# Altium PCB op.PcbDoc
Units mm, origin at the board's own origin, x right, y up, seen from the top; angles counter-clockwise.
Board outline 18 x 18 mm, 2 copper layers (Top Layer, Bottom Layer); 12 components, 7 nets, 28 pads, 0 vias.
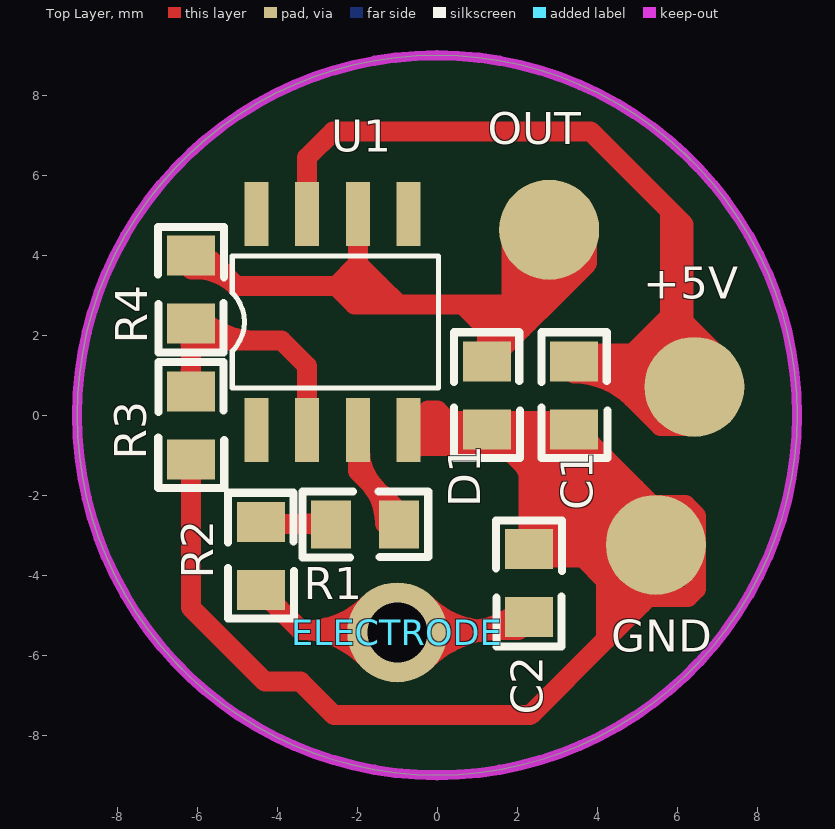
[diagram p0: Top Layer view]
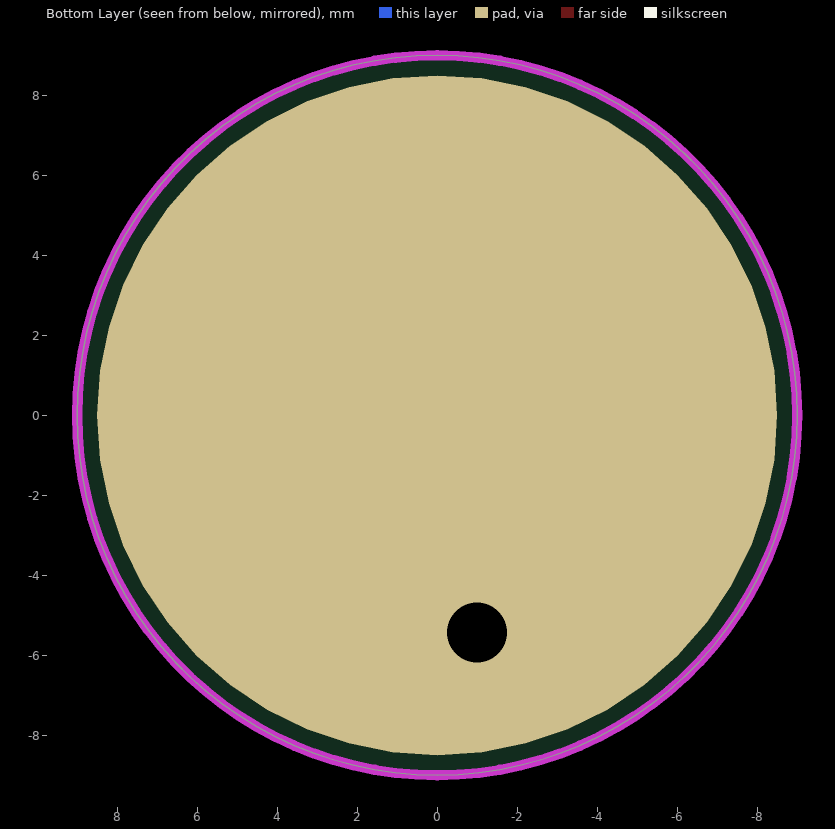
[diagram p1: Bottom Layer view, seen from below]

## Layer stack, top to bottom
Top Layer: signal copper 0.0356
Dielectric: dielectric 0.32, FR-4, Dk 4.8
Bottom Layer: signal copper 0.0356

## Board outline
-8.998,0.004 ccw(c0.002,0.004) 0.002,-8.996 ccw(c0.002,0.004) 9.002,0.004 ccw(c0.002,0.004) 0.002,9.004 ccw(c0.002,0.004)

## Design rules (kind name [scope] priority, off if disabled: settings)
Clearance Clearance_1 [inpolygon] p1: gap=0.5
Clearance [All] p2: gap=0.25
MinimumSolderMaskSliver [All] p1: minsoldermaskwidth=0.01
PolygonConnect PolygonConnect_1 [isvia] p1: connectstyle=Direct reliefconductorwidth=0.254 reliefentries=4 polygonreliefangle="90 Angle"
PolygonConnect [All] p2: connectstyle=Relief reliefconductorwidth=0.254 reliefentries=4 polygonreliefangle="90 Angle"
RoutingVias [All] p1: holewidth=0.3 width=0.66 viastyle="Through Hole" minholewidth=0.3 minwidth=0.66 maxholewidth=0.3 maxwidth=0.66
SilkToSilkClearance [All] p1: silktosilkclearance=0.01
SilkscreenOverComponentPads [All] p1: minsilkscreentomaskgap=0.01
SolderMaskExpansion [All] p1: expansion=0.102
Width [All] p1: maxlimit=1 minlimit=0.15 preferedwidth=0.254 minimp=50.000000 maximp=50.000000 favimp=50.000000
25 further rules are at their usual default settings.

## Components (designator, comment, footprint, x,y, rotation, side; value= is the part's Value field where it differs from the comment)
+5V "OUT" P 6.432,0.709 r0 top
C1 "100nF" 0603 3.43,0.491 r270 top
C2 "1uf" 0603 2.298,-4.194 r90 top
D1 "PGB1010603" 0603 1.244,0.491 r270 top
ELECTRODE "ELECTRODE" T -0.995,-5.427 r90 top
GND "GND" P 5.471,-3.24 r0 top
OUT "OUT" P 2.804,4.638 r0 top
R1 "3K" 0603 -1.802,-2.727 r180 top
R2 "200R" 0603 -4.406,-3.52 r270 top
R3 "1K" 0603 -6.148,-0.254 r270 top
R4 "100K" 0603 -6.153,3.15 r90 top
U1 "OPA376AID" SOIC-8 -4.519,-0.364 r90 top

## Footprints (in the part's own frame and the unit in brackets; to place one, negate y for a bottom-side part, rotate by r counter-clockwise, add the part's x,y. Pads: shape width x height; smd on the part's side, far side on the other; paste and mask are expansions set on the pad)
0603 [mm]
  rect 1x1.2 smd: 1(-0.85,0) 2(0.85,0)
  silkscreen extent -1.58,-0.82 1.56,0.83
P [mm]
  round 2.5 smd mask+0.3: 1(0,0)
SOIC-8 [mm]
  rect 1.6x0.6 smd: 1(0,0) 2(0,-1.27) 3(0,-2.54) 4(0,-3.81) 5(5.4,-3.81) 6(5.4,-2.54) 7(5.4,-1.27) 8(5.4,0)
  silkscreen extent 1.05,-4.55 4.35,0.6
T [mm]
  round 2.5 hole 1.5 mask+0.3: 1(0,0)

## Part data
+5V ELECTRODE GND OUT: library part CON1, "Connector"
C1 C2: library part CAP, "Capacitor"
D1: library part DIODE
R1 R2 R3 R4: library part RES1
U1: library part 376

## Free pads (board coordinates)
  round 17 on Bottom Solder: 0(0,0)
  round 17 smd far side: 0(0,0)

## Nets (pads, with @x,y where several pads share a name; then routed paths per layer and width w, separated by ;. In a path a pad name is that pad's centre, name@x,y a point inside that pad or via, vN(x,y) a via of type N, cw(c..) or ccw(c..) an arc to the next point about the centre after c; other vN are vias at no path point)
+5V: +5V.1 C1.1 U1.7 | length 36.6
  Top Layer w0.5: U1.7 -3.249,6.443 -2.598,7.095 3.841,7.095 5.824,5.111 ; C1.1@3.229,1.54 4.888,1.54 ; C1.1@3.43,1.041 cw(c3.43,-1.02) 4.888,0.437 ; C1.1@3.43,1.291 4.034,1.291 ; C1.1@3.43,1.541 cw(c3.43,0.687) 4.034,1.291 ; 4.634,1.54 ccw(c4.634,0.087) C1.1@3.607,1.114 ; 5.207,1.291 cw(c5.207,0.556) +5V.1@5.936,0.647 ; +5V.1@5.44,0.585 ccw(c4.64,0.485) 4.64,1.291 ; +5V.1@5.851,1.291 4.64,1.291 ; +5V.1@6.54,-0.264 5.589,-0.264 4.034,1.291 ; +5V.1@7.063,1.115 7.063,1.437 6.168,2.333 ; C1.1@3.607,1.114 cw(c4.034,0.688) 4.034,1.291 ; C1.1@3.607,1.114 cw(c4.034,0.688) 4.034,1.291 ; C1.1@3.607,1.114 cw(c4.034,0.688) 4.034,1.291 ; C1.1@3.607,1.468 ccw(c4.034,1.895) 4.034,1.291 ; C1.1@3.607,1.468 ccw(c4.034,1.895) 4.034,1.291 ; C1.1@3.607,1.468 ccw(c4.034,1.895) 4.034,1.291 ; 4.034,1.291 4.64,1.291 ; 4.64,1.291 4.888,1.54 ; 4.888,1.54 5.824,2.475 5.824,2.677 ; 5.824,2.677 6.168,2.333 ; 5.824,2.677 5.824,5.111 ; 5.824,5.111 6.168,4.768 6.168,2.333
GND: C1.2 C2.2 D1.2 GND.1 R3.2 U1.4 | length 73.9
  Top Layer w0.5: R3.2@-6.333,-1.188 cw(c-6.759,-1.615) -6.156,-1.615 cw(c-5.552,-1.615) R3.2@-5.979,-1.188 ; R3.2@-6.156,-1.011 -6.156,-4.805 -4.3,-6.66 -3.415,-6.66 -2.577,-7.499 ; -2.386,-7.499 -2.577,-7.499 ; 0.508,-0.364 ccw(c0.508,0.427) D1.2@1.067,-0.132 ; D1.2@0.781,-0.773 ccw(c0.781,0.085) D1.2@1.434,-0.471 ; D1.2@1.054,-0.147 cw(c-0.3,1.005) -0.3,-0.773 D1.2@1.708,-0.773 ; D1.2@1.244,-0.559 cw(c1.244,-1.162) 1.671,-0.736 cw(c2.097,-0.309) D1.2@1.494,-0.309 ; D1.2@1.244,-0.309 D1.2@1.299,-0.364 ; D1.2@1.421,-0.132 ccw(c1.98,0.427) 1.98,-0.364 ; C2.2@2.121,-3.217 ccw(c1.732,-2.829) 2.282,-2.829 ; C2.2@2.282,-3.574 C2.2@2.282,-3.558 ; 2.282,-2.753 ccw(c2.939,-2.753) 2.475,-3.217 ccw(c3.297,-2.395) 3.297,-3.558 ; 2.282,-0.62 2.282,-1.347 ; C2.2@2.475,-3.571 cw(c3.274,-4.37) 3.274,-3.24 ; C2.2@2.489,-3.24 GND.1 ccw(c3.697,-3.093) 4.955,-1.834 ; 2.694,-0.364 ccw(c2.694,0.427) C1.2@3.253,-0.132 ; C1.2@3.375,-0.364 D1.2@1.299,-0.364 ; C1.2@3.43,-0.559 cw(c3.43,-1.162) 3.857,-0.736 cw(c4.284,-0.309) C1.2@3.68,-0.309 ; C1.2@3.43,-0.309 5.369,-2.248 6.206,-2.248 GND.1@6.471,-2.513 ; 4.193,-1.072 cw(c2.289,-2.976) GND.1@4.972,-3.199 ; 4.221,-4.646 4.221,-4.667 ; 4.221,-3.725 4.221,-4.132 ; GND.1@4.474,-3.157 ccw(c0.88,-2.859) 3.43,-0.309 3.271,-0.149 0.278,-0.149 ; GND.1@4.759,-3.943 cw(c4.189,-4.505) 4.755,-5.071 ; GND.1@4.763,-3.947 ccw(c3.056,-5.654) 3.056,-3.24 ccw(c3.056,-0.826) GND.1@4.763,-2.533 ; 5.111,-4.715 ccw(c4.548,-4.151) GND.1@5.115,-3.591 ; GND.1@5.744,-3.24 GND.1@6.471,-2.513 ; -2.577,-7.499 2.327,-7.499 4.221,-5.605 ; 0.278,-0.149 0.008,0.121 -0.224,0.121 U1.4 0.492,-0.364 ; 0.278,-0.149 0.492,-0.364 ; 0.492,-0.364 D1.2@1.299,-0.364 ; D1.2@1.299,-0.364 D1.2@1.708,-0.773 ; D1.2@1.708,-0.773 2.282,-1.347 ; C2.2@2.282,-3.558 2.282,-1.347 ; C2.2@2.282,-3.558 3.647,-3.558 4.221,-4.132 ; 4.221,-5.605 4.221,-4.667 ; 4.221,-5.605 4.755,-5.071 ; 4.221,-4.667 4.221,-4.132 ; 4.221,-4.667 4.625,-5.071 4.755,-5.071 ; 4.221,-4.132 4.63,-4.541 5.285,-4.541 ; 4.755,-5.071 5.285,-4.541 ; 5.285,-4.541 6.268,-4.541 6.471,-4.338 GND.1@6.471,-2.513 ; U1.4@-0.674,-0.899 cw(c-0.369,-1.204) -0.369,-0.773 ccw(c-0.369,-1.204) U1.4@-0.674,-0.899
NetC2_1: C2.1 ELECTRODE.1 pad.0@0,0 R2.2 | length 18.9
  Top Layer w0.5: R2.2@-4.406,-4.57 cw(c-4.406,-5.025) R2.2@-4.083,-4.703 ; R2.2@-4.296,-4.491 -3.421,-5.365 ; R2.2@-4.156,-4.32 ccw(c-3.404,-4.32) R2.2@-3.935,-4.851 ; -3.26,-5.365 ccw(c-3.26,-3.161) ELECTRODE.1@-1.702,-4.72 ; -2.278,-5.365 cw(c-2.278,-6.613) ELECTRODE.1@-1.362,-5.766 ; ELECTRODE.1@-1.729,-6.106 ccw(c-3.421,-7.67) -3.421,-5.365 ; ELECTRODE.1@-0.641,-5.78 cw(c0.361,-6.783) 0.361,-5.365 ; ELECTRODE.1@-0.288,-6.134 cw(c1.568,-7.99) 1.568,-5.365 ; ELECTRODE.1@-0.288,-4.72 ccw(c1.271,-3.161) 1.271,-5.365 ; 0.798,-5.365 ccw(c0.798,-3.495) C2.1@2.121,-4.817 ; C2.1@2.187,-5.212 2.033,-5.365 -3.421,-5.365
NetR1_1: R1.1 U1.3 | length 4.9
  Top Layer w0.5: U1.3 -1.979,-1.393 R1.1@-0.885,-2.488 ; U1.3@-1.929,-0.864 ccw(c-0.53,-0.864) -1.519,-1.853 ; -1.742,-1.631 cw(c-2.811,-2.7) R1.1@-1.299,-2.7
NetR1_2: R1.2 R2.1 | length 3.6
  Top Layer w0.5: R2.1@-4.406,-2.72 R1.2@-2.669,-2.72 ; R2.1@-4.229,-2.897 cw(c-3.802,-3.323) -3.802,-2.72 cw(c-3.802,-2.116) R2.1@-4.229,-2.543 ; -3.301,-2.72 ccw(c-3.301,-2.048) R1.2@-2.826,-2.523 ; -3.204,-2.72 cw(c-3.204,-3.255) R1.2@-2.826,-2.877
NetR3_1: R3.1 R4.1 U1.2 | length 10.7
  Top Layer w0.5: R3.1@-6.333,0.766 ccw(c-6.759,1.192) -6.156,1.192 ccw(c-5.552,1.192) R3.1@-5.979,0.766 ; R3.1@-6.156,0.589 R4.1@-6.156,1.867 ; R4.1@-6.156,2.297 R4.1@-6.156,1.867 ; R4.1@-5.979,2.12 ccw(c-5.552,1.693) -6.156,1.693 ccw(c-6.759,1.693) -6.333,2.12 ccw(c-5.721,2.732) R4.1@-5.721,1.867 ; R4.1@-5.979,2.474 ccw(c-4.514,3.939) -4.514,1.867 ; U1.2 -3.249,1.23 -3.886,1.867 R4.1@-6.156,1.867
OUT: D1.1 OUT.1 R4.2 U1.6 | length 36.1
  Top Layer w0.5: R4.2@-6.156,3.897 -5.684,3.897 -5.021,3.234 ; R4.2@-6.137,3.648 cw(c-6.029,2.225) -5.021,3.234 ; U1.6 -1.979,3.78 ; D1.1@1.067,1.468 ccw(c0.64,1.895) 1.244,1.895 ccw(c1.847,1.895) D1.1@1.421,1.468 ; D1.1@1.244,1.541 ccw(c1.244,2.145) 1.671,1.718 ccw(c2.097,1.291) D1.1@1.494,1.291 ; OUT.1@1.861,4.708 1.861,3.639 ; OUT.1@2.282,3.785 cw(c1.709,2.852) 2.804,2.852 ; 2.787,3.203 2.463,3.203 ; OUT.1 2.804,3.186 ; OUT.1@3.327,3.785 ccw(c3.9,2.852) 2.804,2.852 ; OUT.1@3.754,4.878 3.754,3.801 2.804,2.852 ; -5.021,3.234 -2.525,3.234 ; -2.525,3.234 -2.064,2.773 -0.972,2.773 ; -2.525,3.234 -1.48,3.234 -1.457,3.257 ; -2.525,3.234 -1.979,3.78 ; -1.979,3.78 -1.457,3.257 ; -1.457,3.257 -0.972,2.773 ; -0.972,2.773 0.643,2.773 ; 0.643,2.773 1.861,2.773 ; 0.643,2.773 1.017,2.399 ; 1.017,2.399 1.244,2.172 ; 1.017,2.399 2.191,2.399 2.271,2.319 ; 1.244,2.172 2.125,2.172 ; 1.244,2.172 1.244,1.291 2.125,2.172 ; 1.861,2.773 1.861,3.203 ; 1.861,2.773 2.391,2.773 2.804,3.186 ; 1.861,3.203 2.463,3.203 ; 1.861,3.203 1.861,3.639 ; 1.861,3.639 2.027,3.639 2.463,3.203 ; 2.125,2.172 2.271,2.319 ; 2.271,2.319 2.804,2.852 ; 2.804,2.852 2.804,3.186 ; 2.804,3.186 cw(c3.359,3.186) 3.161,3.704 ccw(c3.359,3.186) 2.804,3.186 ; 2.804,3.186 ccw(c2.25,3.186) 2.448,3.704 cw(c2.25,3.186) 2.804,3.186
pads on no net: U1.1 U1.5 U1.8

## Keep-outs
Keep-Out Layer:
  circle w0.254: c0,0 r9

## Other copper
Top Layer:
  region net GND: 1.385,-0.329 3.6,-0.329 5.816,-2.544 5.816,-4.213 5.644,-4.385 4.677,-4.385 3.554,-3.262 2.852,-3.262 2.243,-2.653 2.243,-1.873
  region net +5V: 5.775,2.746 5.775,2.404 4.789,1.417 3.843,1.417 5.534,-0.274 6.58,-0.274 7.023,0.169 6.812,0.38 6.812,1.749